# Altium PCB msp430最小系统.PcbDoc (part 1 of 3)
Units mm, origin at the board's own origin, x right, y up, seen from the top; angles counter-clockwise.
Board outline 152.4 x 101.6 mm, 2 copper layers (Top Layer, Bottom Layer); 67 components, 101 nets, 330 pads, 20 vias.
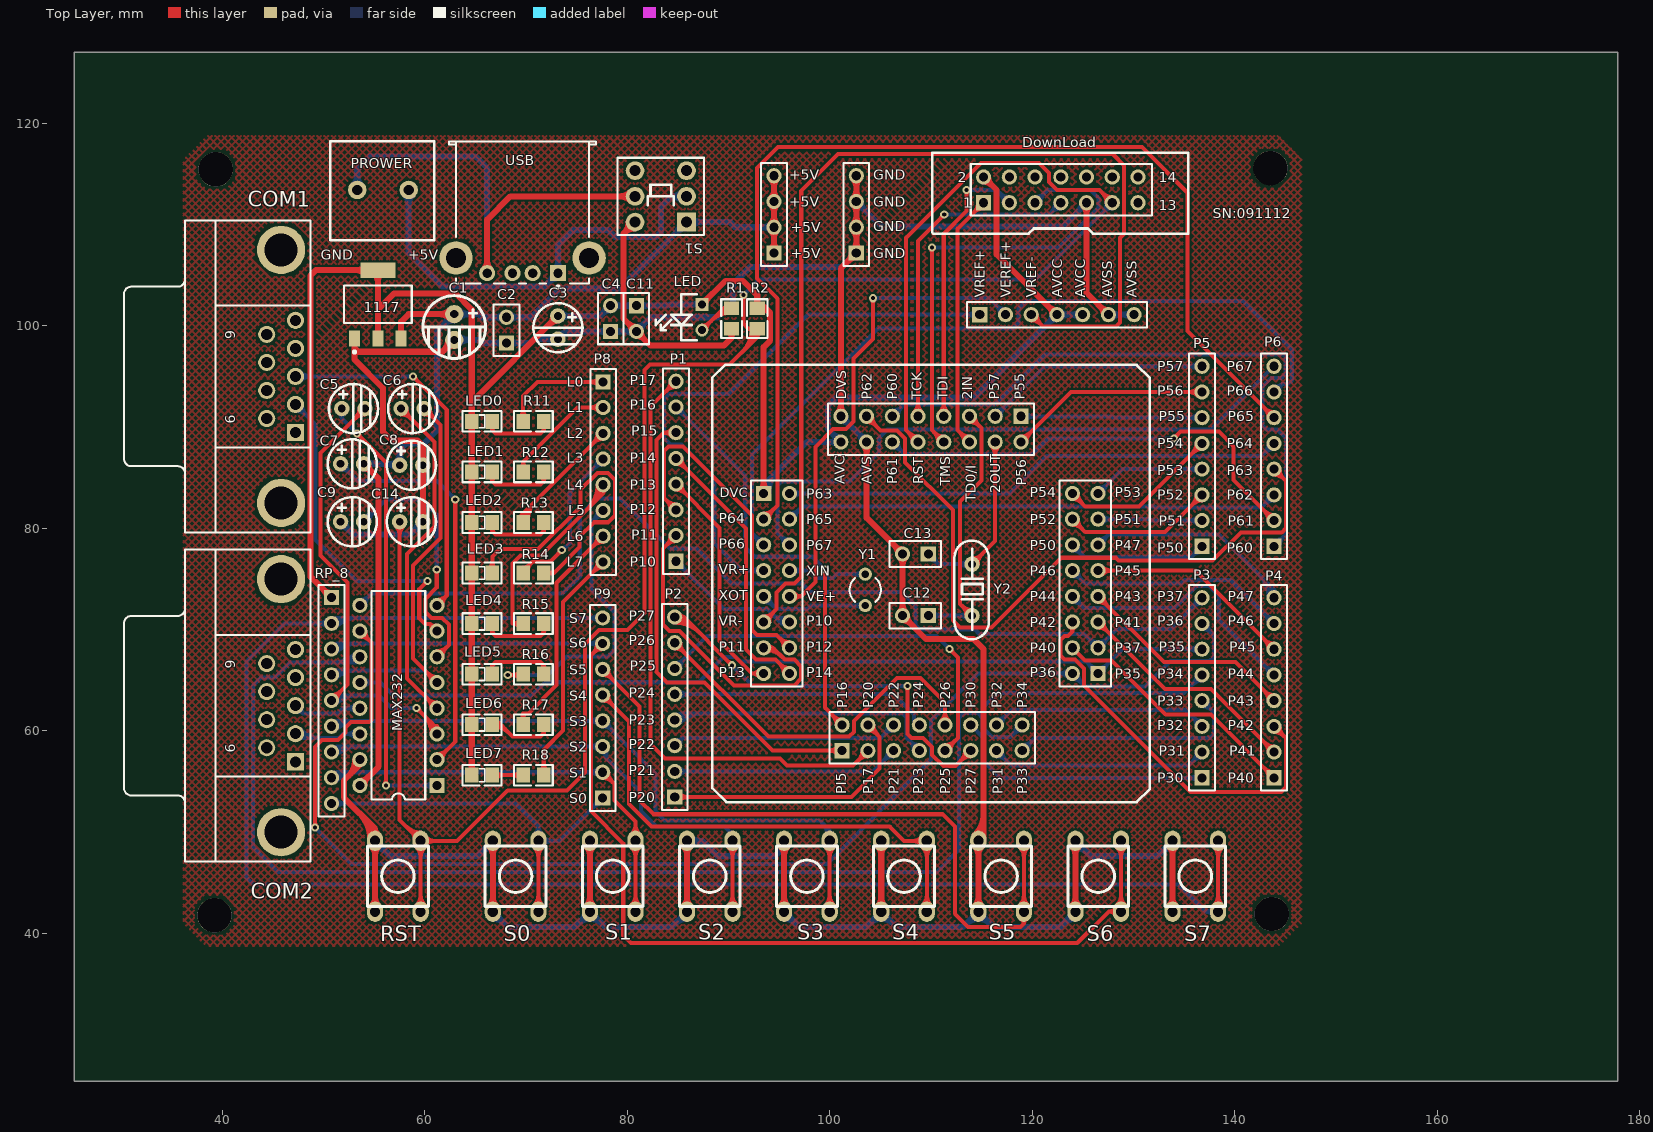
[diagram p0: Top Layer view]
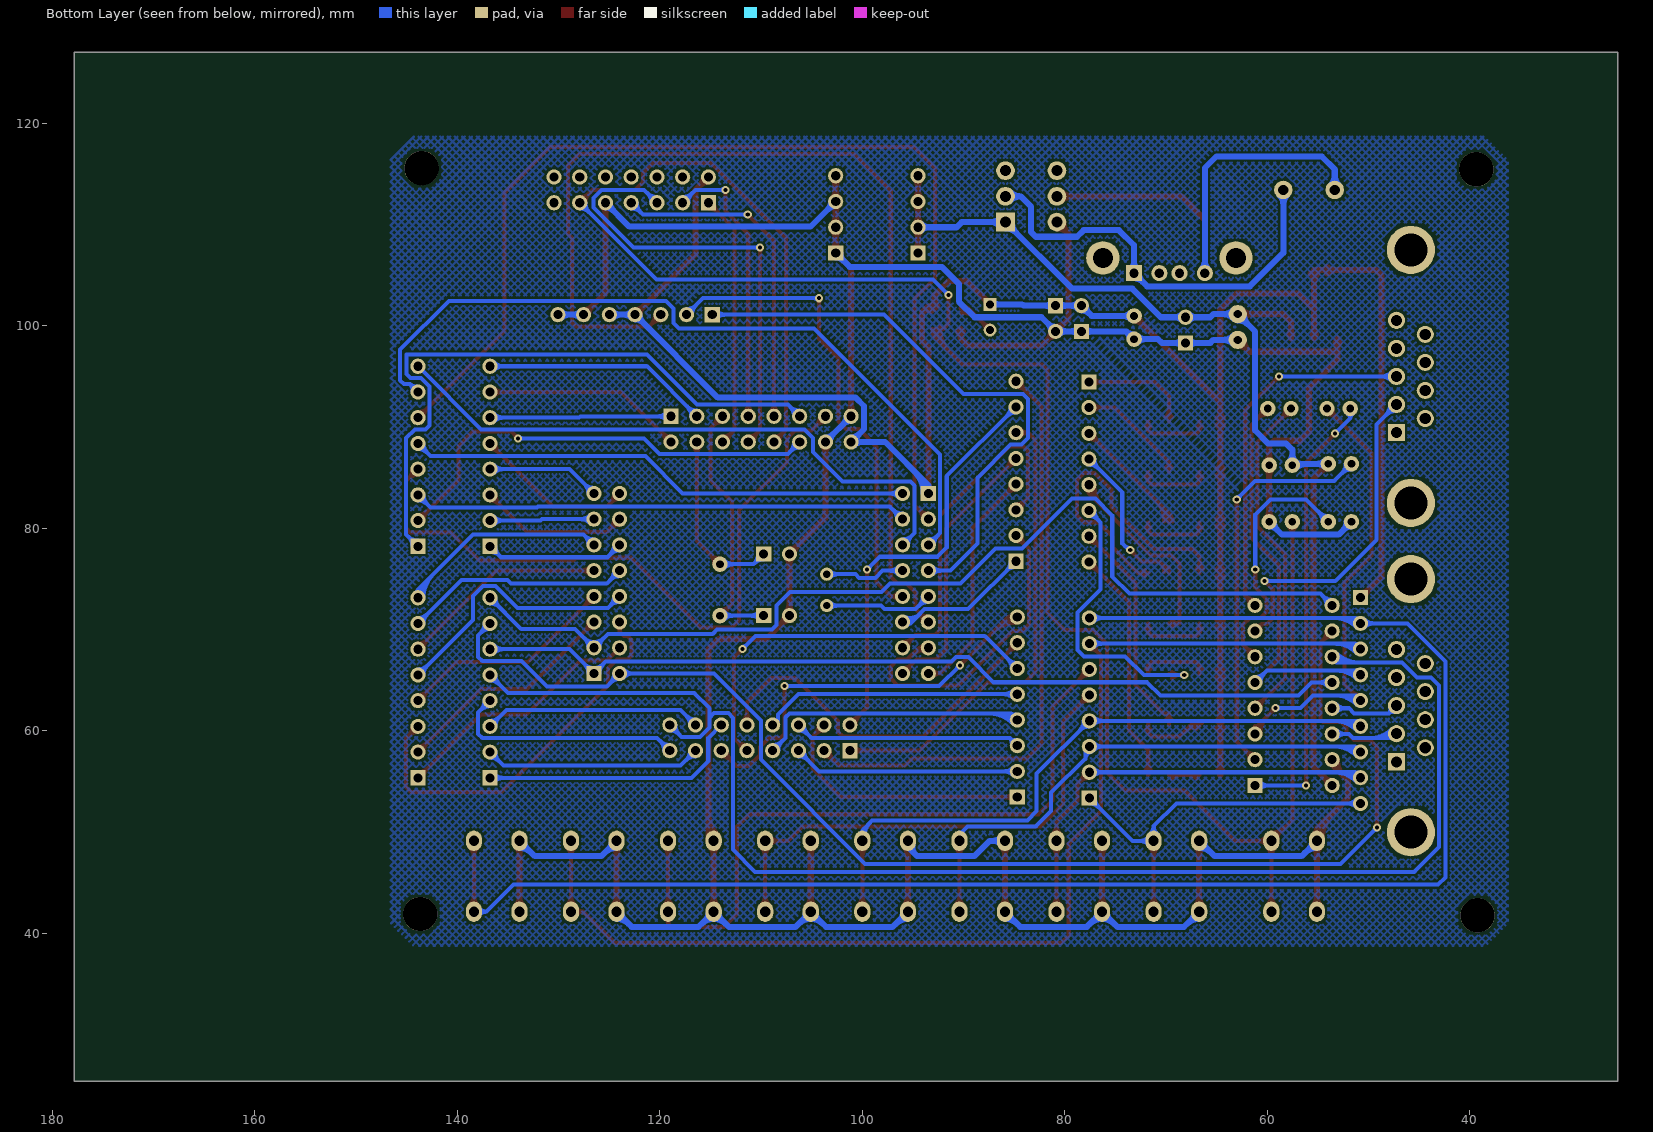
[diagram p1: Bottom Layer view, seen from below]

## Layer stack, top to bottom
Top Layer: signal copper 0.0356
Dielectric: dielectric 0.32, FR-4, Dk 4.8
Bottom Layer: signal copper 0.0356

## Board outline
25.4,25.4 177.8,25.4 177.8,127 25.4,127

## Design rules (kind name [scope] priority, off if disabled: settings)
Clearance [All] p1: gap=0.2
ComponentClearance [All] p1: gap=0.254 collisioncheckmode=3 verticalgap=0.254
PlaneClearance [All] p1: clearance=0.6
PolygonConnect [All] p1: connectstyle=Relief reliefconductorwidth=0.254 reliefentries=4 polygonreliefangle="90 Angle"
RoutingTopology [All] p1: topology=Vertical
RoutingVias [All] p1: holewidth=0.4 width=0.8 viastyle="Through Hole" minholewidth=0.4 minwidth=0.8 maxholewidth=0.4 maxwidth=0.8
SolderMaskExpansion [All] p1: expansion=0.102
TestPointUsage [All] p1: valid=0 allowmultiple=FALSE
Testpoint [All] p1: side=7 testpointundercomponent=TRUE minsize=1.016 maxsize=2.54 preferedsize=1.524 minholesize=0 maxholesize=1.016 preferedholesize=0.813 testpointgrid=0.025 style=1021 order=0-112345678
Width Width_5 [InNet('AVSS')] p1: maxlimit=0.6 minlimit=0.6 preferedwidth=0.6
Width Width_4 [InNet('NetPROWER_2')] p2: maxlimit=0.6 minlimit=0.6 preferedwidth=0.6
Width Width_3 [InNet('NetPROWER_1')] p3: maxlimit=0.6 minlimit=0.6 preferedwidth=0.6
Width Width_2 [InNet('AVCC')] p4: maxlimit=0.6 minlimit=0.6 preferedwidth=0.6
Width Width_1 [InNet('+5V')] p5: maxlimit=0.6 minlimit=0.6 preferedwidth=0.6
Width [All] p6: maxlimit=0.4 minlimit=0.4 preferedwidth=0.4
15 further rules are at their usual default settings.

## Classes and differential pairs
component class msp430最小系统: +5V C1 C2 C3 C4 C5 C6 C7 C8 C9 C10 C11 C12 C13 C14 COM1 COM2 DownLoad GND LED LED0 LED1 LED2 LED3 LED4 LED5 LED6 LED7 MSP430 P1 S0 S1 S2 S3 S4 S5 S6 S7

## Components (designator, comment, footprint, x,y, rotation, side; value= is the part's Value field where it differs from the comment)
1117 "REG1117-3.3" ZZ311 55.372,102.108 r0 top (schematic designator REG1117-3.3)
+5V "Header 4" HDR1X4 94.488,107.188 r90 top
C1 "Cap Pol1" C-DJ-6 62.992,98.552 r270 top
C2 "Cap Semi" CPDR 68.072,99.568 r90 top
C3 "Cap Pol1" C-DJ-4#1 70.612,98.552 r270 top
C4 "Cap Semi" CPDR 78.359,100.711 r90 top
C5 "Cap Pol1" C-DJ-4#1 54.229,89.281 r0 top
C6 "Cap Pol1" C-DJ-4#1 60.071,89.281 r0 top
C7 "Cap Pol1" C-DJ-4#2 54.102,83.82 r0 top
C8 "Cap Pol1" C-DJ-4#1 59.944,83.693 r0 top
C9 "Cap Pol1" C-DJ-4#1 54.102,78.105 r0 top
C11 "Cap Semi" CPDR 80.899,100.711 r270 top
C12 "CPDR" CPDR 108.458,71.374 r180 top (schematic designator C14)
C13 "CPDR" CPDR 108.458,77.47 r180 top (schematic designator C15)
C14 "Cap Pol1" C-DJ-4#1 59.944,78.105 r0 top (schematic designator C16)
COM1 "D Connector 9" COM-9 47.244,106.68 r90 top
COM2 "D Connector 9" COM-9 47.244,74.168 r90 top
DownLoad "Header 7X2" HDR-2X7 120.396,112.268 r0 top
GND "Header 4" HDR1X4 102.616,107.188 r90 top
LED "LED" LED 86.868,100.076 r90 top (schematic designator DS1)
LED0 "LED" TP-0805-D 68.199,89.281 r0 top (schematic designator D10)
LED1 "LED" TP-0805-D 68.199,84.292 r0 top (schematic designator D11)
LED2 "LED" TP-0805-D 68.199,79.302 r0 top (schematic designator D12)
LED3 "LED" TP-0805-D 68.199,74.313 r0 top (schematic designator D13)
LED4 "LED" TP-0805-D 68.199,69.324 r0 top (schematic designator D14)
LED5 "LED" TP-0805-D 68.199,64.335 r0 top (schematic designator D15)
LED6 "LED" TP-0805-D 68.199,59.345 r0 top (schematic designator D16)
LED7 "LED" TP-0805-D 68.199,54.356 r0 top (schematic designator D17)
MAX232 "MAX232CSE" DIP-16 57.404,63.5 r90 top (schematic designator U1)
P1 "Header 8" HDR-8 84.836,89.408 r90 top
P1_16 "Header 8X2" HDR2X8 93.472,83.439 r270 top
P2 "Header 8" HD-8 88.392,66.548 r90 top
P3 "Header 8" HD-8 140.462,68.453 r90 top
P4 "Header 8" HD-8 147.574,68.453 r90 top
P5 "Header 8" HD-8 140.462,91.313 r90 top
P6 "Header 8" HD-8 147.574,91.313 r90 top
P7 "Header 7" HDR1X7 114.808,101.092 r0 top
P8 "PZ_8" HDR-8 77.597,81.788 r270 top
P9 "PZ_8" HDR-8 77.597,66.04 r90 top
P17_32 "Header 8X2" HDR2X8 101.219,58.039 r0 top
P33_48 "Header 8X2" HDR2X8 126.492,65.659 r90 top
P49_64 "Header 8X2" HDR2X8 118.872,91.059 r180 top
PROWER "PZ_2" JK128_2 57.912,112.268 r270 top
R1 "Res" TP-0805-R 91.567,103.251 r90 top
R2 "Res" TP-0805-R 91.567,98.171 r270 top
R11 "RES1" TP-0805-R 73.279,89.281 r0 top
R12 "RES1" TP-0805-R 73.279,84.292 r0 top
R13 "RES1" TP-0805-R 73.279,79.302 r0 top
R14 "RES1" TP-0805-R 73.279,74.313 r0 top
R15 "RES1" TP-0805-R 73.279,69.324 r0 top
R16 "RES1" TP-0805-R 73.279,64.335 r0 top
R17 "RES1" TP-0805-R 73.279,59.345 r0 top
R18 "RES1" TP-0805-R 68.199,56.896 r180 top
RP_8 "Comment" HDR-9 50.8,57.912 r270 top
RST "AJKG" an-6*6 62.484,51.816 r90 top (schematic designator S2)
S0 "S0" an-6*6 74.105,51.816 r90 top (schematic designator 1)
S1 "ZSKG_KEY" DPDT-6 83.312,112.776 r180 top
S1 "S1" an-6*6 83.693,51.816 r90 top (schematic designator 2)
S2 "S2" an-6*6 93.281,51.816 r90 top (schematic designator 3)
S3 "S3" an-6*6 102.87,51.816 r90 top (schematic designator 4)
S4 "S4" an-6*6 112.459,51.816 r90 top (schematic designator 5)
S5 "S5" an-6*6 122.047,51.816 r90 top (schematic designator 6)
S6 "S6" an-6*6 131.636,51.816 r90 top (schematic designator 7)
S7 "S7" an-6*6 141.224,51.816 r90 top (schematic designator 8)
USB "PZ_4" USB-5V 66.04,107.696 r90 top
Y1 "XTAL" BCY-W2/D3.1 103.505,73.914 r0 top
Y2 "XTAL" JZ_ZC 114.046,71.374 r270 top

## Footprints (in the part's own frame and the unit in brackets; to place one, negate y for a bottom-side part, rotate by r counter-clockwise, add the part's x,y. Pads: shape width x height; smd on the part's side, far side on the other; paste and mask are expansions set on the pad)
an-6*6 [mm] "按键"
  oval 2x1.6 hole 1: 1(-9.675,7.381) 1(-2.675,7.381) 2(-9.675,2.881) 2(-2.675,2.881)
  silkscreen extent -9.17,2.13 -3.17,8.13
BCY-W2/D3.1 [mm] "Crystal, Thru-Hole; 2 Leads; Body 3.1 x 8.2 mm (Dia.xH)"
  round 1.3 hole 0.7: 1(0,1.55) 2(0,-1.55)
  silkscreen extent -1.55,-1.19 1.55,1.17
C-DJ-4#1 [mil] "电容4mm"
  round 60 hole 30: 1(-95,100) 2(-5,100)
  silkscreen extent -145,5 46,196
C-DJ-4#2 [mil] "电容4mm"
  round 60 hole 30: 1(-95,100)
  round 60 hole 30 paste+0: 2(-5,100)
  silkscreen extent -145,5 46,195
C-DJ-6 [mm] "电容6mm"
  round 1.8 hole 0.8: 1(-2.591,-0.076) 2(-0.051,-0.076)
  silkscreen extent -4.42,-3.18 1.78,3.02
COM-9 [mm] "串口通信口"
  rect 1.69x1.69 hole 1.09: 1(-17.224,0.002)
  round 1.69 hole 1.09: 2(-14.454,0.002) 3(-11.684,0.002) 4(-8.914,0.002) 5(-6.144,0.002) 6(-15.839,2.842) 7(-13.069,2.842) 8(-10.299,2.842) 9(-7.529,2.842)
  round 4.76 hole 3.26: 10(-24.179,1.422) 11(0.811,1.422)
  silkscreen extent -27.08,-1.48 3.72,16.92
CPDR [mm] "瓷片电容"
  rect 1.5x1.5 hole 0.9: 1(-1.27,0)
  round 1.5 hole 0.9: 2(1.27,0)
  silkscreen extent -2.54,-1.27 2.54,1.27
DIP-16 [mm] "直插16管脚"
  rect 1.5x1.5 hole 0.9: 1(-8.89,-3.81)
  round 1.5 hole 0.9: 2(-6.35,-3.81) 3(-3.81,-3.81) 4(-1.27,-3.81) 5(1.27,-3.81) 6(3.81,-3.81) 7(6.35,-3.81) 8(8.89,-3.81) 9(8.89,3.81) 10(6.35,3.81) 11(3.81,3.81) 12(1.27,3.81) 13(-1.27,3.81) 14(-3.81,3.81) 15(-6.35,3.81) 16(-8.89,3.81)
  silkscreen extent -10.3,-2.65 10.3,2.65
DPDT-6 [mm] "开关按键"
  round 1.85 hole 1.1: 1(-2.54,0) 2(-2.54,-2.54) 4(2.54,-2.54) 5(2.54,0) 6(2.54,2.54)
  rect 1.85x1.85 hole 1.1: 3(-2.54,2.54)
  silkscreen extent -4.28,-3.81 4.28,3.81
HD-8 [mm] "8排针"
  rect 1.5x1.5 hole 0.9: 1(-13.093,3.707)
  round 1.5 hole 0.9: 2(-10.553,3.707) 3(-8.013,3.707) 4(-5.473,3.707) 5(-2.933,3.707) 6(-0.393,3.707) 7(2.147,3.707) 8(4.687,3.707)
  silkscreen extent -14.36,2.44 5.96,4.98
HDR1X4 [mm] "Connector; Header; 4 Position"
  rect 1.5x1.5 hole 0.9: 1(0,0)
  round 1.5 hole 0.9: 2(2.54,0) 3(5.08,0) 4(7.62,0)
  silkscreen extent -1.27,-1.27 8.89,1.27
HDR1X7 [mm] "Connector; Header; 7 Position"
  rect 1.5x1.5 hole 0.9: 1(0,0)
  round 1.5 hole 0.9: 2(2.54,0) 3(5.08,0) 4(7.62,0) 5(10.16,0) 6(12.7,0) 7(15.24,0)
  silkscreen extent -1.27,-1.27 16.51,1.27
HDR2X8 [mm]
  rect 1.5x1.5 hole 0.9: 1(0,0)
  round 1.5 hole 0.9: 2(0,2.54) 3(2.54,0) 4(2.54,2.54) 5(5.08,0) 6(5.08,2.54) 7(7.62,0) 8(7.62,2.54) 9(10.16,0) 10(10.16,2.54) 11(12.7,0) 12(12.7,2.54) 13(15.24,0) 14(15.24,2.54) 15(17.78,0) 16(17.78,2.54)
  silkscreen extent -1.27,-1.27 19.05,3.81
HDR-2X7 [mm] "MPS430下载口"
  rect 1.5x1.5 hole 0.9: 1(-5.207,-0.127)
  round 1.5 hole 0.9: 2(-5.207,2.413) 3(-2.667,-0.127) 4(-2.667,2.413) 5(-0.127,-0.127) 6(-0.127,2.413) 7(2.413,-0.127) 8(2.413,2.413) 9(4.953,-0.127) 10(4.953,2.413) 11(7.493,-0.127) 12(7.493,2.413) 13(10.033,-0.127) 14(10.033,2.413)
  silkscreen extent -10.29,-3.17 14.99,4.83
HDR-8 [mm] "8排针"
  rect 1.5x1.5 hole 0.9: 1(-12.669,0.023)
  round 1.5 hole 0.9: 2(-10.129,0.023) 3(-7.589,0.023) 4(-5.049,0.023) 5(-2.509,0.023) 6(0.031,0.023) 7(2.571,0.023) 8(5.111,0.023)
  silkscreen extent -13.94,-1.25 6.38,1.29
HDR-9 [mm] "9排针"
  rect 1.5x1.5 hole 0.9: 1(-15.24,0)
  round 1.5 hole 0.9: 2(-12.7,0) 3(-10.16,0) 4(-7.62,0) 5(-5.08,0) 6(-2.54,0) 7(0,0) 8(2.54,0) 9(5.08,0)
  silkscreen extent -16.51,-1.27 6.35,1.27
JK128_2 [mil] "接线端子"
  round 71.81 hole 39.37: 1(-45,20) 2(-45,-180)
  silkscreen extent -235,-285 150,120
JZ_ZC [mil] "晶振"
  round 60 hole 30: 1(-200,0) 2(0,0)
  silkscreen extent -292,-68 92,65
LED [mil] "发光二极管"
  rect 50x50 hole 32: 1(80,-20)
  round 50 hole 32: 2(-20,-20)
  silkscreen extent -60,0 120,160
TP-0805-D [mm] "贴片二极管"
  rect 1.3x1.5 smd: 1(-3.556,1.27) 2(-1.524,1.27)
  silkscreen extent -4.44,0.25 -0.64,2.29
TP-0805-R [mm] "贴片0805"
  rect 1.3x1.5 smd: 1(-3.556,1.27) 2(-1.524,1.27)
  silkscreen extent -4.44,0.25 -0.64,2.29
USB-5V [mm] "USB接口"
  rect 1.6x1.6 hole 0.92: 1(-2.503,-7.123)
  round 1.6 hole 0.92: 2(-2.503,-4.624) 3(-2.503,-2.624) 4(-2.503,-0.124)
  round 3.3 hole 2: 5(-1.002,2.947) 6(-1.002,-10.193)
  silkscreen extent -3.98,-10.87 10.5,3.63
ZZ311 [mm] "SOT-223/SC-73; 4 Leads; Body 6.7 x 7.3 mm, inc. leads (LxW max)"
  rect 1.1x1.55 smd: 1(-2.3,-3.375) 2(0,-3.375) 3(2.3,-3.375)
  rect 3.45x1.55 smd: 4(0,3.375)
  silkscreen extent -3.35,-4.82 3.35,1.85

## Part data
1117: "800mA and 1A Low Dropout Positive Regulator 2.85V, 3.3V, 5V, and Adjustable"
+5V GND: "Header, 4-Pin"
C1 C3 C5 C6 C7 C8 C9 C14: "Polarized Capacitor (Radial)"
C2 C4 C11: "Capacitor (Semiconductor SIM Model)"
C12 C13: "瓷片电容"
COM1 COM2: "Receptacle Assembly, 9 Position, Right Angle"
DownLoad: "Header, 7-Pin, Dual row"
LED: "发光二极管"
MAX232: "+5V Powered, Multi-Channel RS-232 Driver/Receiver"
P1 P2 P3 P4 P5 P6: "Header, 8-Pin"
P1_16 P17_32 P33_48 P49_64: "Header, 8-Pin, Dual row"
P7: "Header, 7-Pin"
P8 P9: "排针——8"
PROWER: "排针——2"
R1 R2: "电阻"
RST: "按键开关"
S0 S1 S2 S3 S4 S5 S6 S7: library part KEY
S1: "自锁开关"
USB: "排针——4"
Y1 Y2: "Crystal Oscillator"

## Free pads (board coordinates)
  round 3.4 hole 3.4: 0(143.51,115.57) 1(143.637,41.91) 2(39.243,41.783) 3(39.37,115.443)

## Via types
v1: diameter 0.8, hole 0.4, Top Layer to Bottom Layer, 20 vias

## Nets (pads, with @x,y where several pads share a name; then routed paths per layer and width w, separated by ;. In a path a pad name is that pad's centre, name@x,y a point inside that pad or via, vN(x,y) a via of type N, cw(c..) or ccw(c..) an arc to the next point about the centre after c; other vN are vias at no path point)
5V: 
+5V: 1117.3 +5V.1 +5V.2 +5V.3 +5V.4 C1.1 C2.2 C7.2 C8.1 MAX232.16 S1.3 | length 173.2
  Top Layer w0.6: MAX232.16@53.594,54.61 55.444,56.46 55.444,84.891 C7.2@53.975,86.36 ; 1117.3@57.672,98.733 57.672,100.395 58.42,101.143 C1.1@62.916,101.143 ; +5V.1@94.488,107.188 +5V.2@94.488,109.728 +5V.3@94.488,112.268 +5V.4@94.488,114.808 ; 54.362,55.378 cw(c53.594,56.146) 53.594,55.06 ccw(c53.594,56.146) 54.362,55.378 ; 54.362,55.378 ccw(c55.13,54.61) 54.044,54.61 cw(c55.13,54.61) 54.362,55.378 ; 54.764,85.571 cw(c55.552,86.36) 54.437,86.36 ccw(c55.552,86.36) 54.764,85.571 ; 54.764,85.571 ccw(c53.975,84.783) 53.975,85.898 cw(c53.975,84.783) 54.764,85.571 ; 57.672,99.562 cw(c57.068,99.562) 57.495,99.135 ccw(c57.068,99.562) 57.672,99.562 ; 57.672,99.562 ccw(c58.276,99.562) 57.849,99.135 cw(c58.276,99.562) 57.672,99.562 ; 61.467,101.143 cw(c61.467,99.694) 62.492,100.719 ccw(c61.467,99.694) 61.467,101.143 ; 61.467,101.143 ccw(c61.467,102.591) 62.492,101.567 cw(c61.467,102.591) 61.467,101.143 ; 94.488,108.274 cw(c93.402,108.274) 94.17,107.506 ccw(c93.402,108.274) 94.488,108.274 ; 94.488,108.274 ccw(c95.574,108.274) 94.806,107.506 cw(c95.574,108.274) 94.488,108.274 ; 94.488,108.642 cw(c95.574,108.642) 94.806,109.41 ccw(c95.574,108.642) 94.488,108.642 ; 94.488,108.642 ccw(c93.402,108.642) 94.17,109.41 cw(c93.402,108.642) 94.488,108.642 ; 94.488,110.814 cw(c93.402,110.814) 94.17,110.046 ccw(c93.402,110.814) 94.488,110.814 ; 94.488,110.814 ccw(c95.574,110.814) 94.806,110.046 cw(c95.574,110.814) 94.488,110.814 ; 94.488,111.182 cw(c95.574,111.182) 94.806,111.95 ccw(c95.574,111.182) 94.488,111.182 ; 94.488,111.182 ccw(c93.402,111.182) 94.17,111.95 cw(c93.402,111.182) 94.488,111.182 ; 94.488,113.354 cw(c93.402,113.354) 94.17,112.586 ccw(c93.402,113.354) 94.488,113.354 ; 94.488,113.354 ccw(c95.574,113.354) 94.806,112.586 cw(c95.574,113.354) 94.488,113.354 ; 94.488,113.722 cw(c95.574,113.722) 94.806,114.49 ccw(c95.574,113.722) 94.488,113.722 ; 94.488,113.722 ccw(c93.402,113.722) 94.17,114.49 cw(c93.402,113.722) 94.488,113.722
  Bottom Layer w0.6: C7.2@53.975,86.36 57.404,86.36 57.531,86.487 57.531,87.757 58.166,88.392 59.944,88.392 61.214,89.662 61.214,99.441 C1.1@62.916,101.143 65.329,101.143 65.634,100.838 C2.2@68.072,100.838 70.508,100.838 73.327,103.657 79.273,103.657 S1.3@85.852,110.236 90.17,110.236 90.678,109.728 +5V.2@94.488,109.728 ; C7.2@54.302,86.033 cw(c55.09,85.245) 55.09,86.36 cw(c55.09,87.475) C7.2@54.302,86.687 ; 56.109,86.36 cw(c56.109,84.811) C8.1@57.204,85.906 ; 56.722,86.36 ccw(c56.722,87.042) 57.204,86.56 ccw(c56.416,87.348) 57.531,87.348 ccw(c58.646,87.348) C8.1@57.858,86.56 ; 61.892,100.119 cw(c62.916,99.094) 62.916,100.543 ccw(c62.916,99.094) 61.892,100.119 ; 61.892,100.119 ccw(c60.867,101.143) 62.316,101.143 cw(c60.867,101.143) 61.892,100.119 ; 64.364,101.143 cw(c64.364,102.591) 63.34,101.567 ccw(c64.364,102.591) 64.364,101.143 ; 64.364,101.143 ccw(c64.364,99.694) 63.34,100.719 cw(c64.364,99.694) 64.364,101.143 ; 66.986,100.838 cw(c66.986,99.752) 67.754,100.52 ccw(c66.986,99.752) 66.986,100.838 ; 66.986,100.838 ccw(c66.986,101.924) 67.754,101.156 cw(c66.986,101.924) 66.986,100.838 ; 69.158,100.838 cw(c69.158,101.924) 68.39,101.156 ccw(c69.158,101.924) 69.158,100.838 ; 69.158,100.838 ccw(c69.158,99.752) 68.39,100.52 cw(c69.158,99.752) 69.158,100.838 ; 84.785,109.169 cw(c85.852,108.102) 85.852,109.611 ccw(c85.852,108.102) 84.785,109.169 ; 84.785,109.169 ccw(c83.718,110.236) 85.227,110.236 cw(c83.718,110.236) 84.785,109.169 ; 87.361,110.236 cw(c87.361,111.745) 86.294,110.678 ccw(c87.361,111.745) 87.361,110.236 ; 87.361,110.236 ccw(c87.361,108.727) 86.294,109.794 cw(c87.361,108.727) 87.361,110.236 ; 93.402,109.728 cw(c93.402,108.642) 94.17,109.41 ccw(c93.402,108.642) 93.402,109.728 ; 93.402,109.728 ccw(c93.402,110.814) 94.17,110.046 cw(c93.402,110.814) 93.402,109.728
AVCC: 1117.2 1117.4 C3.1 C4.2 C11.1 DownLoad.2 LED0.1 LED1.1 LED2.1 LED3.1 LED4.1 LED5.1 LED6.1 LED7.1 LED.1 P1_16.1 P7.4 P7.5 P49_64.16 R2.1 RP_8.1 | length 340.1
  Top Layer w0.6: RP_8.1@50.8,73.152 48.743,75.209 48.743,104.975 49.251,105.483 1117.4@55.372,105.483 55.372,101.6 ; 1117.2@55.372,98.733 55.372,101.6 ; LED7.1@64.643,55.626 LED6.1@64.643,60.615 LED5.1@64.643,65.605 LED4.1@64.643,70.594 LED3.1@64.643,75.583 LED2.1@64.643,80.572 LED1.1@64.643,85.562 LED0.1@64.643,90.551 64.643,92.456 ; C3.1@73.152,100.965 64.643,92.456 ; LED.1@87.376,102.108 89.687,104.419 91.44,104.419 92.837,103.022 R2.1@92.837,101.727 93.662,101.727 ; P1_16.1@93.472,83.439 93.472,97.892 94.107,98.527 94.107,101.282 93.662,101.727 ; DownLoad.2@115.189,114.681 116.459,113.411 116.459,107.061 P7.4@122.428,101.092 ; 50.032,73.92 cw(c49.264,73.152) 50.35,73.152 ccw(c49.264,73.152) 50.032,73.92 ; 50.032,73.92 ccw(c50.8,74.688) 50.8,73.602 cw(c50.8,74.688) 50.032,73.92 ; 53.275,105.483 cw(c53.275,104.336) 54.086,105.147 ccw(c53.275,104.336) 53.275,105.483 ; 53.275,105.483 ccw(c53.275,106.63) 54.086,105.819 cw(c53.275,106.63) 53.275,105.483 ; 55.372,99.562 cw(c54.768,99.562) 55.195,99.135 ccw(c54.768,99.562) 55.372,99.562 ; 55.372,99.562 ccw(c55.976,99.562) 55.549,99.135 cw(c55.976,99.562) 55.372,99.562 ; 55.372,101.6 56.972,103.2 63.043,103.2 64.643,101.6 64.643,92.456 ; 55.372,104.336 cw(c56.519,104.336) 55.708,105.147 ccw(c56.519,104.336) 55.372,104.336 ; 55.372,104.336 ccw(c54.225,104.336) 55.036,105.147 cw(c54.225,104.336) 55.372,104.336 ; 64.643,56.571 cw(c63.798,56.571) 64.396,55.973 ccw(c63.798,56.571) 64.643,56.571 ; 64.643,56.571 ccw(c65.488,56.571) 64.89,55.973 cw(c65.488,56.571) 64.643,56.571 ; 64.643,59.67 cw(c65.488,59.67) 64.89,60.268 ccw(c65.488,59.67) 64.643,59.67 ; 64.643,59.67 ccw(c63.798,59.67) 64.396,60.268 cw(c63.798,59.67) 64.643,59.67 ; 64.643,61.56 cw(c63.798,61.56) 64.396,60.963 ccw(c63.798,61.56) 64.643,61.56 ; 64.643,61.56 ccw(c65.488,61.56) 64.89,60.963 cw(c65.488,61.56) 64.643,61.56 ; 64.643,64.66 cw(c65.488,64.66) 64.89,65.257 ccw(c65.488,64.66) 64.643,64.66 ; 64.643,64.66 ccw(c63.798,64.66) 64.396,65.257 cw(c63.798,64.66) 64.643,64.66 ; 64.643,66.55 cw(c63.798,66.55) 64.396,65.952 ccw(c63.798,66.55) 64.643,66.55 ; 64.643,66.55 ccw(c65.488,66.55) 64.89,65.952 cw(c65.488,66.55) 64.643,66.55 ; 64.643,69.649 cw(c65.488,69.649) 64.89,70.246 ccw(c65.488,69.649) 64.643,69.649 ; 64.643,69.649 ccw(c63.798,69.649) 64.396,70.246 cw(c63.798,69.649) 64.643,69.649 ; 64.643,71.539 cw(c63.798,71.539) 64.396,70.941 ccw(c63.798,71.539) 64.643,71.539 ; 64.643,71.539 ccw(c65.488,71.539) 64.89,70.941 cw(c65.488,71.539) 64.643,71.539 ; 64.643,74.638 cw(c65.488,74.638) 64.89,75.236 ccw(c65.488,74.638) 64.643,74.638 ; 64.643,74.638 ccw(c63.798,74.638) 64.396,75.236 cw(c63.798,74.638) 64.643,74.638 ; 64.643,76.528 cw(c63.798,76.528) 64.396,75.931 ccw(c63.798,76.528) 64.643,76.528 ; 64.643,76.528 ccw(c65.488,76.528) 64.89,75.931 cw(c65.488,76.528) 64.643,76.528 ; 64.643,79.627 cw(c65.488,79.627) 64.89,80.225 ccw(c65.488,79.627) 64.643,79.627 ; 64.643,79.627 ccw(c63.798,79.627) 64.396,80.225 cw(c63.798,79.627) 64.643,79.627 ; 64.643,81.517 cw(c63.798,81.517) 64.396,80.92 ccw(c63.798,81.517) 64.643,81.517 ; 64.643,81.517 ccw(c65.488,81.517) 64.89,80.92 cw(c65.488,81.517) 64.643,81.517 ; 64.643,84.617 cw(c65.488,84.617) 64.89,85.214 ccw(c65.488,84.617) 64.643,84.617 ; 64.643,84.617 ccw(c63.798,84.617) 64.396,85.214 cw(c63.798,84.617) 64.643,84.617 ; 64.643,86.507 cw(c63.798,86.507) 64.396,85.909 ccw(c63.798,86.507) 64.643,86.507 ; 64.643,86.507 ccw(c65.488,86.507) 64.89,85.909 cw(c65.488,86.507) 64.643,86.507 ; 64.643,89.606 cw(c65.488,89.606) 64.89,90.203 ccw(c65.488,89.606) 64.643,89.606 ; 64.643,89.606 ccw(c63.798,89.606) 64.396,90.203 cw(c63.798,89.606) 64.643,89.606 ; 64.643,91.496 cw(c63.798,91.496) 64.396,90.898 ccw(c63.798,91.496) 64.643,91.496 ; 64.643,91.496 ccw(c65.488,91.496) 64.89,90.898 cw(c65.488,91.496) 64.643,91.496 ; 72.363,100.176 cw(c73.152,99.388) 73.152,100.503 ccw(c73.152,99.388) 72.363,100.176 ; 72.363,100.176 ccw(c71.575,100.965) 72.69,100.965 cw(c71.575,100.965) 72.363,100.176 ; LED.1@87.948,102.68 cw(c87.376,103.252) 87.376,102.443 ccw(c87.376,103.252) LED.1@87.948,102.68 ; LED.1@87.948,102.68 ccw(c88.52,102.108) 87.711,102.108 cw(c88.52,102.108) LED.1@87.948,102.68 ; 92.837,102.572 cw(c91.992,102.572) 92.59,101.974 ccw(c91.992,102.572) 92.837,102.572 ; 92.837,102.572 ccw(c93.682,102.572) 93.084,101.974 cw(c93.682,102.572) 92.837,102.572 ; 93.472,84.525 cw(c92.386,84.525) 93.154,83.757 ccw(c92.386,84.525) 93.472,84.525 ; 93.472,84.525 ccw(c94.558,84.525) 93.79,83.757 cw(c94.558,84.525) 93.472,84.525 ; 93.662,101.727 cw(c93.662,102.304) 93.211,101.945 ccw(c93.662,102.304) 93.662,101.727 ; 93.662,101.727 ccw(c93.662,101.15) 93.211,101.509 cw(c93.662,101.15) 93.662,101.727 ; 115.957,113.913 cw(c116.725,114.681) 115.639,114.681 ccw(c116.725,114.681) 115.957,113.913 ; 115.957,113.913 ccw(c115.189,113.145) 115.189,114.231 cw(c115.189,113.145) 115.957,113.913 ; 121.66,101.86 cw(c120.892,101.092) 121.978,101.092 ccw(c120.892,101.092) 121.66,101.86 ; 121.66,101.86 ccw(c122.428,102.628) 122.428,101.542 cw(c122.428,102.628) 121.66,101.86 ; R2.1@92.893,101.973 cw(c93.045,101.122) 93.656,101.733 ccw(c93.045,101.122) R2.1@92.893,101.973 ; R2.1@93.138,101.441 cw(c93.536,100.875) 94.025,101.364 ccw(c93.536,100.875) R2.1@93.138,101.441
  Bottom Layer w0.6: C3.1@73.152,100.965 77.343,100.965 C4.2@78.359,101.981 C11.1@80.899,101.981 84.074,101.981 84.201,102.108 LED.1@87.376,102.108 ; P1_16.1@93.472,83.439 93.472,84.245 ; P7.5@124.968,101.092 P7.4@122.428,101.092 114.245,92.909 100.656,92.909 99.822,92.075 99.822,89.789 P49_64.16@101.092,88.519 97.746,88.519 93.472,84.245 ; 74.267,100.965 cw(c74.267,102.08) 73.479,101.292 ccw(c74.267,102.08) 74.267,100.965 ; 74.267,100.965 ccw(c74.267,99.85) 73.479,100.638 cw(c74.267,99.85) 74.267,100.965 ; 77.591,101.213 cw(c78.359,100.445) 78.359,101.531 ccw(c78.359,100.445) 77.591,101.213 ; 77.591,101.213 ccw(c76.823,101.981) 77.909,101.981 cw(c76.823,101.981) 77.591,101.213 ; 79.445,101.981 cw(c79.445,103.067) 78.677,102.299 ccw(c79.445,103.067) 79.445,101.981 ; 79.445,101.981 ccw(c79.445,100.895) 78.677,101.663 cw(c79.445,100.895) 79.445,101.981 ; 79.813,101.981 cw(c79.813,100.895) 80.581,101.663 ccw(c79.813,100.895) 79.813,101.981 ; 79.813,101.981 ccw(c79.813,103.067) 80.581,102.299 cw(c79.813,103.067) 79.813,101.981 ; 81.985,101.981 cw(c81.985,103.067) 81.217,102.299 ccw(c81.985,103.067) 81.985,101.981 ; 81.985,101.981 ccw(c81.985,100.895) 81.217,101.663 cw(c81.985,100.895) 81.985,101.981 ; 86.567,102.108 cw(c86.567,101.299) 87.139,101.871 ccw(c86.567,101.299) 86.567,102.108 ; 86.567,102.108 ccw(c86.567,102.917) 87.139,102.345 cw(c86.567,102.917) 86.567,102.108 ; 93.472,84.245 cw(c92.975,84.245) 93.236,83.822 ccw(c92.975,84.245) 93.472,84.245 ; 93.472,84.245 ccw(c93.969,84.245) 93.708,83.822 cw(c93.969,84.245) 93.472,84.245 ; 100.006,88.519 cw(c100.006,87.433) 100.774,88.201 ccw(c100.006,87.433) 100.006,88.519 ; 100.006,88.519 ccw(c100.006,89.605) 100.774,88.837 cw(c100.006,89.605) 100.006,88.519 ; 100.324,89.287 cw(c99.556,88.519) 100.642,88.519 ccw(c99.556,88.519) 100.324,89.287 ; 100.324,89.287 ccw(c101.092,90.055) 101.092,88.969 cw(c101.092,90.055) 100.324,89.287 ; 121.66,100.324 cw(c122.428,99.556) 122.428,100.642 ccw(c122.428,99.556) 121.66,100.324 ; 121.66,100.324 ccw(c120.892,101.092) 121.978,101.092 cw(c120.892,101.092) 121.66,100.324 ; 123.514,101.092 cw(c123.514,102.178) 122.746,101.41 ccw(c123.514,102.178) 123.514,101.092 ; 123.514,101.092 ccw(c123.514,100.006) 122.746,100.774 cw(c123.514,100.006) 123.514,101.092 ; 123.882,101.092 cw(c123.882,100.006) 124.65,100.774 ccw(c123.882,100.006) 123.882,101.092 ; 123.882,101.092 ccw(c123.882,102.178) 124.65,101.41 cw(c123.882,102.178) 123.882,101.092 ; P1_16.1@93.322,83.439 cw(c94.906,83.439) 93.786,84.559 ccw(c94.906,83.439) P1_16.1@93.322,83.439 ; P1_16.1@93.922,83.439 cw(c96.955,83.439) 94.81,85.583 ccw(c96.955,83.439) P1_16.1@93.922,83.439
AVSS: 1117.1 C1.2 C2.1 C3.2 C4.1 C8.2 C9.1 C11.2 C12.2 C13.2 C14.2 DownLoad.9 GND.1 GND.2 GND.3 GND.4 MAX232.15 P7.6 P7.7 P49_64.14 P49_64.15 R1.1 RST.1 S0.1 S1.1@76.312,42.141 S1.1@76.312,49.141 S1.6 S2.1 S3.1 S4.1 S5.1 S6.1 S7.1 | length 679.3
  Top Layer w0.6: 53.072,97.79 53.428,97.434 61.747,97.434 C1.2@62.916,98.603 ; 1117.1@53.072,98.733 53.072,96.647 55.88,93.839 55.88,89.535 56.769,88.646 59.309,88.646 59.817,88.138 C14.2@59.817,80.645 ; MAX232.15@53.594,57.15 53.594,56.667 52.019,55.093 52.019,53.401 55.103,50.317 ; RST.1@55.103,42.141 RST.1@55.103,49.141 55.103,50.317 ; C14.2@59.49,80.972 ccw(c58.702,81.76) 59.817,81.76 ccw(c60.932,81.76) C14.2@60.144,80.972 ; C8.2@59.49,85.906 cw(c58.702,85.118) 59.817,85.118 cw(c60.932,85.118) C8.2@60.144,85.906 ; C8.2@59.49,86.56 ccw(c58.702,87.348) 59.817,87.348 ccw(c60.932,87.348) C8.2@60.144,86.56 ; S0.1@66.724,42.141 S0.1@66.724,49.141 ; S1.1@76.312,42.141 S1.1@76.312,49.141 ; S1.6@80.772,110.236 79.629,109.093 79.629,100.711 C11.2@80.899,99.441 82.296,98.044 89.535,98.044 90.297,98.806 R1.1@90.297,99.695 ; S2.1@85.901,42.141 S2.1@85.901,49.141 ; S3.1@95.489,42.141 S3.1@95.489,49.141 ; P49_64.15@101.092,91.059 101.092,105.664 GND.1@102.616,107.188 GND.2@102.616,109.728 GND.3@102.616,112.268 GND.4@102.616,114.808 ; P49_64.14@103.632,88.519 103.632,81.026 C13.2@107.188,77.47 C12.2@107.188,71.374 109.499,69.063 114.198,69.063 115.189,68.072 115.189,49.141 S5.1@114.666,49.141 S5.1@114.666,42.141 ; S4.1@105.078,42.141 S4.1@105.078,49.141 ; S6.1@124.255,42.141 S6.1@124.255,49.141 ; DownLoad.9@125.349,112.141 125.349,103.251 P7.6@127.508,101.092 ; S7.1@133.843,42.141 S7.1@133.843,49.141 ; 1117.1@52.895,98.331 cw(c52.468,97.904) 53.072,97.904 ; 1117.1@52.895,98.331 cw(c52.468,97.904) 53.072,97.904 ; 1117.1@52.895,98.331 cw(c52.468,97.904) 53.072,97.904 ; 1117.1@52.895,98.331 cw(c52.468,97.904) 53.072,97.904 ; 1117.1@52.895,98.331 cw(c52.468,97.904) 53.072,97.904 ; 1117.1@52.895,98.331 cw(c52.468,97.904) 53.072,97.904 ; 53.072,97.904 cw(c53.676,97.904) 1117.1@53.249,98.331 ; 53.072,97.904 cw(c53.676,97.904) 1117.1@53.249,98.331 ; 53.072,97.904 cw(c53.676,97.904) 1117.1@53.249,98.331 ; 53.072,97.904 cw(c53.676,97.904) 1117.1@53.249,98.331 ; 53.072,97.904 cw(c53.676,97.904) 1117.1@53.249,98.331 ; 53.072,97.904 cw(c53.676,97.904) 1117.1@53.249,98.331 ; 55.103,43.548 cw(c53.896,43.548) 54.75,42.695 ccw(c53.896,43.548) 55.103,43.548 ; 55.103,43.548 ccw(c56.31,43.548) 55.457,42.695 cw(c56.31,43.548) 55.103,43.548 ; 55.103,47.734 cw(c56.31,47.734) 55.457,48.587 ccw(c56.31,47.734) 55.103,47.734 ; 55.103,47.734 ccw(c53.896,47.734) 54.75,48.587 cw(c53.896,47.734) 55.103,47.734 ; 55.103,50.317 cw(c54.4,50.317) 54.811,49.747 ccw(c54.4,50.317) 55.103,50.317 ; 55.103,50.317 ccw(c55.806,50.317) 55.395,49.747 cw(c55.806,50.317) 55.103,50.317 ; 61.892,97.579 cw(c62.916,96.554) 62.916,98.003 ccw(c62.916,96.554) 61.892,97.579 ; 61.892,97.579 ccw(c60.867,98.603) 62.316,98.603 cw(c60.867,98.603) 61.892,97.579 ; 66.724,43.548 cw(c65.517,43.548) 66.37,42.695 ccw(c65.517,43.548) 66.724,43.548 ; 66.724,43.548 ccw(c67.931,43.548) 67.077,42.695 cw(c67.931,43.548) 66.724,43.548 ; 66.724,47.734 cw(c67.931,47.734) 67.077,48.587 ccw(c67.931,47.734) 66.724,47.734 ; 66.724,47.734 ccw(c65.517,47.734) 66.37,48.587 cw(c65.517,47.734) 66.724,47.734 ; 76.312,43.548 cw(c75.105,43.548) 75.959,42.695 ccw(c75.105,43.548) 76.312,43.548 ; 76.312,43.548 ccw(c77.519,43.548) 76.666,42.695 cw(c77.519,43.548) 76.312,43.548 ; 76.312,47.734 cw(c77.519,47.734) 76.666,48.587 ccw(c77.519,47.734) 76.312,47.734 ; 76.312,47.734 ccw(c75.105,47.734) 75.959,48.587 cw(c75.105,47.734) 76.312,47.734 ; 79.705,109.169 cw(c80.772,108.102) 80.772,109.611 ccw(c80.772,108.102) 79.705,109.169 ; 79.705,109.169 ccw(c78.638,110.236) 80.147,110.236 cw(c78.638,110.236) 79.705,109.169 ; 80.131,100.209 cw(c79.363,99.441) 80.449,99.441 ccw(c79.363,99.441) 80.131,100.209 ; 80.131,100.209 ccw(c80.899,100.977) 80.899,99.891 cw(c80.899,100.977) 80.131,100.209 ; 81.667,98.673 cw(c82.435,99.441) 81.349,99.441 ccw(c82.435,99.441) 81.667,98.673 ; 81.667,98.673 ccw(c80.899,97.905) 80.899,98.991 cw(c80.899,97.905) 81.667,98.673 ; 85.901,43.548 cw(c84.694,43.548) 85.547,42.695 ccw(c84.694,43.548) 85.901,43.548 ; 85.901,43.548 ccw(c87.108,43.548) 86.254,42.695 cw(c87.108,43.548) 85.901,43.548 ; 85.901,47.734 cw(c87.108,47.734) 86.254,48.587 ccw(c87.108,47.734) 85.901,47.734 ; 85.901,47.734 ccw(c84.694,47.734) 85.547,48.587 cw(c84.694,47.734) 85.901,47.734 ; 90.297,98.85 cw(c91.142,98.85) 90.544,99.448 ccw(c91.142,98.85) 90.297,98.85 ; 90.297,98.85 ccw(c89.452,98.85) 90.05,99.448 cw(c89.452,98.85) 90.297,98.85 ; 95.489,43.548 cw(c94.282,43.548) 95.136,42.695 ccw(c94.282,43.548) 95.489,43.548 ; 95.489,43.548 ccw(c96.696,43.548) 95.843,42.695 cw(c96.696,43.548) 95.489,43.548 ; 95.489,47.734 cw(c96.696,47.734) 95.843,48.587 ccw(c96.696,47.734) 95.489,47.734 ; 95.489,47.734 ccw(c94.282,47.734) 95.136,48.587 cw(c94.282,47.734) 95.489,47.734 ; 101.092,92.145 cw(c100.006,92.145) 100.774,91.377 ccw(c100.006,92.145) 101.092,92.145 ; 101.092,92.145 ccw(c102.178,92.145) 101.41,91.377 cw(c102.178,92.145) 101.092,92.145 ; 101.848,106.42 cw(c102.616,105.652) 102.616,106.738 ccw(c102.616,105.652) 101.848,106.42 ; 101.848,106.42 ccw(c101.08,107.188) 102.166,107.188 cw(c101.08,107.188) 101.848,106.42 ; 102.616,108.274 cw(c101.53,108.274) 102.298,107.506 ccw(c101.53,108.274) 102.616,108.274 ; 102.616,108.274 ccw(c103.702,108.274) 102.934,107.506 cw(c103.702,108.274) 102.616,108.274 ; 102.616,108.642 cw(c103.702,108.642) 102.934,109.41 ccw(c103.702,108.642) 102.616,108.642 ; 102.616,108.642 ccw(c101.53,108.642) 102.298,109.41 cw(c101.53,108.642) 102.616,108.642 ; 102.616,110.814 cw(c101.53,110.814) 102.298,110.046 ccw(c101.53,110.814) 102.616,110.814 ; 102.616,110.814 ccw(c103.702,110.814) 102.934,110.046 cw(c103.702,110.814) 102.616,110.814 ; 102.616,111.182 cw(c103.702,111.182) 102.934,111.95 ccw(c103.702,111.182) 102.616,111.182 ; 102.616,111.182 ccw(c101.53,111.182) 102.298,111.95 cw(c101.53,111.182) 102.616,111.182 ; 102.616,113.354 cw(c101.53,113.354) 102.298,112.586 ccw(c101.53,113.354) 102.616,113.354 ; 102.616,113.354 ccw(c103.702,113.354) 102.934,112.586 cw(c103.702,113.354) 102.616,113.354 ; 102.616,113.722 cw(c103.702,113.722) 102.934,114.49 ccw(c103.702,113.722) 102.616,113.722 ; 102.616,113.722 ccw(c101.53,113.722) 102.298,114.49 cw(c101.53,113.722) 102.616,113.722 ; 103.632,87.433 cw(c104.718,87.433) 103.95,88.201 ccw(c104.718,87.433) 103.632,87.433 ; 103.632,87.433 ccw(c102.546,87.433) 103.314,88.201 cw(c102.546,87.433) 103.632,87.433 ; 105.078,43.548 cw(c103.871,43.548) 104.724,42.695 ccw(c103.871,43.548) 105.078,43.548 ; 105.078,43.548 ccw(c106.285,43.548) 105.431,42.695 cw(c106.285,43.548) 105.078,43.548 ; 105.078,47.734 cw(c106.285,47.734) 105.431,48.587 ccw(c106.285,47.734) 105.078,47.734 ; 105.078,47.734 ccw(c103.871,47.734) 104.724,48.587 cw(c103.871,47.734) 105.078,47.734 ; 106.42,78.238 cw(c105.652,77.47) 106.738,77.47 ccw(c105.652,77.47) 106.42,78.238 ; 106.42,78.238 ccw(c107.188,79.006) 107.188,77.92 cw(c107.188,79.006) 106.42,78.238 ; 107.188,72.46 cw(c106.102,72.46) 106.87,71.692 ccw(c106.102,72.46) 107.188,72.46 ; 107.188,72.46 ccw(c108.274,72.46) 107.506,71.692 cw(c108.274,72.46) 107.188,72.46 ; 107.188,76.384 cw(c108.274,76.384) 107.506,77.152 ccw(c108.274,76.384) 107.188,76.384 ; 107.188,76.384 ccw(c106.102,76.384) 106.87,77.152 cw(c106.102,76.384) 107.188,76.384 ; 107.956,70.606 cw(c108.724,71.374) 107.638,71.374 ccw(c108.724,71.374) 107.956,70.606 ; 107.956,70.606 ccw(c107.188,69.838) 107.188,70.924 cw(c107.188,69.838) 107.956,70.606 ; 114.666,43.548 cw(c113.459,43.548) 114.313,42.695 ccw(c113.459,43.548) 114.666,43.548 ; 114.666,43.548 ccw(c115.873,43.548) 115.02,42.695 cw(c115.873,43.548) 114.666,43.548 ; 114.666,47.734 cw(c115.873,47.734) 115.02,48.587 ccw(c115.873,47.734) 114.666,47.734 ; 114.666,47.734 ccw(c113.459,47.734) 114.313,48.587 cw(c113.459,47.734) 114.666,47.734 ; 124.255,43.548 cw(c123.048,43.548) 123.901,42.695 ccw(c123.048,43.548) 124.255,43.548 ; 124.255,43.548 ccw(c125.462,43.548) 124.608,42.695 cw(c125.462,43.548) 124.255,43.548 ; 124.255,47.734 cw(c125.462,47.734) 124.608,48.587 ccw(c125.462,47.734) 124.255,47.734 ; 124.255,47.734 ccw(c123.048,47.734) 123.901,48.587 cw(c123.048,47.734) 124.255,47.734 ; 125.349,111.055 cw(c126.435,111.055) 125.667,111.823 ccw(c126.435,111.055) 125.349,111.055 ; 125.349,111.055 ccw(c124.263,111.055) 125.031,111.823 cw(c124.263,111.055) 125.349,111.055 ; 126.74,101.86 cw(c125.972,101.092) 127.058,101.092 ccw(c125.972,101.092) 126.74,101.86 ; 126.74,101.86 ccw(c127.508,102.628) 127.508,101.542 cw(c127.508,102.628) 126.74,101.86 ; 133.843,43.548 cw(c132.636,43.548) 133.49,42.695 ccw(c132.636,43.548) 133.843,43.548 ; 133.843,43.548 ccw(c135.05,43.548) 134.197,42.695 cw(c135.05,43.548) 133.843,43.548 ; 133.843,47.734 cw(c135.05,47.734) 134.197,48.587 ccw(c135.05,47.734) 133.843,47.734 ; 133.843,47.734 ccw(c132.636,47.734) 133.49,48.587 cw(c132.636,47.734) 133.843,47.734 ; 52.485,55.558 ccw(c50.893,57.15) 53.144,57.15 cw(c50.893,57.15) 52.485,55.558 ; 53.559,51.861 cw(c51.039,49.341) 54.603,49.341 ccw(c51.039,49.341) 53.559,51.861 ; 54.584,50.837 cw(c53.087,49.341) 55.203,49.341 ccw(c53.087,49.341) 54.584,50.837 ; S5.1@114.313,49.695 ccw(c112.197,51.81) 115.189,51.81 cw(c112.197,51.81) S5.1@114.313,49.695 ; S5.1@114.737,49.27 ccw(c113.646,50.362) 115.189,50.362 cw(c113.646,50.362) S5.1@114.737,49.27
  Bottom Layer w0.6: C9.1@51.689,80.645 52.959,79.375 58.547,79.375 C14.2@59.817,80.645 ; RST.1@55.103,49.141 56.619,47.625 65.208,47.625 S0.1@66.724,49.141 ; C1.2@62.916,98.603 65.329,98.603 65.634,98.298 C2.1@68.072,98.298 70.409,98.298 70.79,98.679 C3.2@73.152,98.679 73.914,99.441 ; S0.1@66.724,42.141 68.225,40.64 74.811,40.64 S1.1@76.312,42.141 77.813,40.64 84.4,40.64 S2.1@85.901,42.141 ; S2.1@85.901,49.141 87.409,49.141 88.925,47.625 94.583,47.625 95.489,48.531 S3.1@95.489,49.141 ; S3.1@95.489,42.141 96.99,40.64 103.577,40.64 S4.1@105.078,42.141 106.579,40.64 113.165,40.64 S5.1@114.666,42.141 116.167,40.64 122.754,40.64 S6.1@124.255,42.141 ; P49_64.15@101.092,91.059 P49_64.14@103.632,88.519 ; GND.1@102.616,107.188 101.244,105.816 92.126,105.816 90.449,104.14 90.449,102.387 88.9,100.838 82.296,100.838 C11.2@80.899,99.441 C4.1@78.359,99.441 73.914,99.441 ; GND.3@102.616,112.268 105.105,109.779 122.987,109.779 DownLoad.9@125.349,112.141 ; S6.1@124.255,49.141 125.771,47.625 132.327,47.625 S7.1@133.843,49.141 ; P7.6@127.508,101.092 P7.7@130.048,101.092 ; 52.478,79.856 cw(c53.266,80.645) 52.151,80.645 ccw(c53.266,80.645) 52.478,79.856 ; 52.478,79.856 ccw(c51.689,79.068) 51.689,80.183 cw(c51.689,79.068) 52.478,79.856 ; 59.028,79.856 cw(c59.817,79.068) 59.817,80.183 ccw(c59.817,79.068) 59.028,79.856 ; 59.028,79.856 ccw(c58.24,80.645) 59.355,80.645 cw(c58.24,80.645) 59.028,79.856 ; 64.364,98.603 cw(c64.364,100.051) 63.34,99.027 ccw(c64.364,100.051) 64.364,98.603 ; 64.364,98.603 ccw(c64.364,97.154) 63.34,98.179 cw(c64.364,97.154) 64.364,98.603 ; 66.986,98.298 cw(c66.986,97.212) 67.754,97.98 ccw(c66.986,97.212) 66.986,98.298 ; 66.986,98.298 ccw(c66.986,99.384) 67.754,98.616 cw(c66.986,99.384) 66.986,98.298 ; 69.158,98.298 cw(c69.158,99.384) 68.39,98.616 ccw(c69.158,99.384) 69.158,98.298 ; 69.158,98.298 ccw(c69.158,97.212) 68.39,97.98 cw(c69.158,97.212) 69.158,98.298 ; 72.037,98.679 cw(c72.037,97.564) 72.825,98.352 ccw(c72.037,97.564) 72.037,98.679 ; 72.037,98.679 ccw(c72.037,99.794) 72.825,99.006 cw(c72.037,99.794) 72.037,98.679 ; 73.914,99.441 cw(c73.189,100.166) 73.163,99.141 ccw(c73.189,100.166) 73.914,99.441 ; 73.914,99.441 ccw(c74.639,98.716) 73.614,98.69 cw(c74.639,98.716) 73.914,99.441 ; S1.1@76.312,41.441 cw(c76.312,39.751) 77.507,40.946 ccw(c76.312,39.751) S1.1@76.312,41.441 ; S1.1@76.312,41.441 ccw(c76.312,39.751) 75.117,40.946 cw(c76.312,39.751) S1.1@76.312,41.441 ; 77.273,99.441 cw(c77.273,98.355) 78.041,99.123 ccw(c77.273,98.355) 77.273,99.441 ; 77.273,99.441 ccw(c77.273,100.527) 78.041,99.759 cw(c77.273,100.527) 77.273,99.441 ; 79.445,99.441 cw(c79.445,100.527) 78.677,99.759 ccw(c79.445,100.527) 79.445,99.441 ; 79.445,99.441 ccw(c79.445,98.355) 78.677,99.123 cw(c79.445,98.355) 79.445,99.441 ; 79.813,99.441 cw(c79.813,98.355) 80.581,99.123 ccw(c79.813,98.355) 79.813,99.441 ; 79.813,99.441 ccw(c79.813,100.527) 80.581,99.759 cw(c79.813,100.527) 79.813,99.441 ; 81.667,100.209 cw(c80.899,100.977) 80.899,99.891 ccw(c80.899,100.977) 81.667,100.209 ; 81.667,100.209 ccw(c82.435,99.441) 81.349,99.441 cw(c82.435,99.441) 81.667,100.209 ; 87.108,49.141 cw(c87.108,50.348) 86.254,49.495 ccw(c87.108,50.348) 87.108,49.141 ; 87.108,49.141 ccw(c87.108,47.934) 86.254,48.787 cw(c87.108,47.934) 87.108,49.141 ; 101.848,106.42 cw(c102.616,105.652) 102.616,106.738 ccw(c102.616,105.652) 101.848,106.42 ; 101.848,106.42 ccw(c101.08,107.188) 102.166,107.188 cw(c101.08,107.188) 101.848,106.42 ; 101.86,90.291 cw(c102.628,91.059) 101.542,91.059 ccw(c102.628,91.059) 101.86,90.291 ; 101.86,90.291 ccw(c101.092,89.523) 101.092,90.609 cw(c101.092,89.523) 101.86,90.291 ; 102.864,89.287 cw(c102.096,88.519) 103.182,88.519 ccw(c102.096,88.519) 102.864,89.287 ; 102.864,89.287 ccw(c103.632,90.055) 103.632,88.969 cw(c103.632,90.055) 102.864,89.287 ; 103.384,111.5 cw(c104.152,112.268) 103.066,112.268 ccw(c104.152,112.268) 103.384,111.5 ; 103.384,111.5 ccw(c102.616,110.732) 102.616,111.818 cw(c102.616,110.732) 103.384,111.5 ; S4.1@105.078,41.441 cw(c105.078,39.751) 106.273,40.946 ccw(c105.078,39.751) S4.1@105.078,41.441 ; S4.1@105.078,41.441 ccw(c105.078,39.751) 103.883,40.946 cw(c105.078,39.751) S4.1@105.078,41.441 ; S5.1@114.666,41.441 cw(c114.666,39.751) 115.861,40.946 ccw(c114.666,39.751) S5.1@114.666,41.441 ; S5.1@114.666,41.441 ccw(c114.666,39.751) 113.471,40.946 cw(c114.666,39.751) S5.1@114.666,41.441 ; 124.581,111.373 cw(c125.349,110.605) 125.349,111.691 ccw(c125.349,110.605) 124.581,111.373 ; 124.581,111.373 ccw(c123.813,112.141) 124.899,112.141 cw(c123.813,112.141) 124.581,111.373 ; 128.594,101.092 cw(c128.594,102.178) 127.826,101.41 ccw(c128.594,102.178) 128.594,101.092 ; 128.594,101.092 ccw(c128.594,100.006) 127.826,100.774 cw(c128.594,100.006) 128.594,101.092 ; 128.962,101.092 cw(c128.962,100.006) 129.73,100.774 ccw(c128.962,100.006) 128.962,101.092 ; 128.962,101.092 ccw(c128.962,102.178) 129.73,101.41 cw(c128.962,102.178) 128.962,101.092 ; RST.1@55.103,48.441 cw(c55.103,46.751) 56.298,47.946 ccw(c55.103,46.751) RST.1@55.103,48.441 ; RST.1@55.603,48.941 ccw(c56.327,48.941) 55.815,48.429 cw(c56.327,48.941) RST.1@55.603,48.941 ; 65.529,47.946 cw(c66.724,46.751) 66.724,48.441 ccw(c66.724,46.751) 65.529,47.946 ; 66.012,48.429 ccw(c65.499,48.941) 66.224,48.941 cw(c65.499,48.941) 66.012,48.429 ; S0.1@66.724,41.441 cw(c66.724,39.751) 67.919,40.946 ccw(c66.724,39.751) S0.1@66.724,41.441 ; S0.1@67.224,41.941 ccw(c67.948,41.941) 67.436,41.429 cw(c67.948,41.941) S0.1@67.224,41.941 ; 75.6,41.429 ccw(c75.088,41.941) 75.812,41.941 cw(c75.088,41.941) 75.6,41.429 ; S1.1@76.812,41.941 ccw(c77.536,41.941) 77.024,41.429 cw(c77.536,41.941) S1.1@76.812,41.941 ; 84.706,40.946 cw(c85.901,39.751) 85.901,41.441 ccw(c85.901,39.751) 84.706,40.946 ; 85.189,41.429 ccw(c84.676,41.941) 85.401,41.941 cw(c84.676,41.941) 85.189,41.429 ; 94.788,47.83 ccw(c94.128,48.49) 95.015,48.784 cw(c94.128,48.49) 94.788,47.83 ; S3.1@95.489,41.441 cw(c95.489,39.751) 96.684,40.946 ccw(c95.489,39.751) S3.1@95.489,41.441 ; S3.1@95.989,41.941 ccw(c96.713,41.941) 96.201,41.429 cw(c96.713,41.941) S3.1@95.989,41.941 ; 104.366,41.429 ccw(c103.853,41.941) 104.578,41.941 cw(c103.853,41.941) 104.366,41.429 ; S4.1@105.578,41.941 ccw(c106.302,41.941) 105.79,41.429 cw(c106.302,41.941) S4.1@105.578,41.941 ; 113.954,41.429 ccw(c113.442,41.941) 114.166,41.941 cw(c113.442,41.941) 113.954,41.429 ; S5.1@115.166,41.941 ccw(c115.89,41.941) 115.378,41.429 cw(c115.89,41.941) S5.1@115.166,41.941 ; 123.06,40.946 cw(c124.255,39.751) 124.255,41.441 ccw(c124.255,39.751) 123.06,40.946 ; 123.543,41.429 ccw(c123.03,41.941) 123.755,41.941 cw(c123.03,41.941) 123.543,41.429 ; S6.1@124.255,48.441 cw(c124.255,46.751) 125.45,47.946 ccw(c124.255,46.751) S6.1@124.255,48.441 ; S6.1@124.755,48.941 ccw(c125.479,48.941) 124.967,48.429 cw(c125.479,48.941) S6.1@124.755,48.941 ; 132.648,47.946 cw(c133.843,46.751) 133.843,48.441 ccw(c133.843,46.751) 132.648,47.946 ; 133.131,48.429 ccw(c132.619,48.941) 133.343,48.941 cw(c132.619,48.941) 133.131,48.429
Net1_2: P9.1 RP_8.9 S0.2 | length 63.5
  Top Layer w0.4: S0.2@71.224,42.141 S0.2@71.224,49.141 ; 71.224,43.79 cw(c69.775,43.79) 70.799,42.765 ccw(c69.775,43.79) 71.224,43.79 ; 71.224,43.79 ccw(c72.672,43.79) 71.648,42.765 cw(c72.672,43.79) 71.224,43.79 ; 71.224,47.492 cw(c72.672,47.492) 71.648,48.517 ccw(c72.672,47.492) 71.224,47.492 ; 71.224,47.492 ccw(c69.775,47.492) 70.799,48.517 cw(c69.775,47.492) 71.224,47.492
  Bottom Layer w0.4: RP_8.9@50.8,52.832 68.986,52.832 71.224,50.595 ; P9.1@77.574,53.371 73.327,49.124 71.224,49.124 S0.2@71.224,49.141 71.224,50.595 ; 52.128,52.832 cw(c52.128,54.16) 51.189,53.221 ccw(c52.128,54.16) 52.128,52.832 ; 52.128,52.832 ccw(c52.128,51.504) 51.189,52.443 cw(c52.128,51.504) 52.128,52.832 ; 71.224,50.595 cw(c70.214,50.595) 70.847,49.808 ccw(c70.214,50.595) 71.224,50.595 ; 71.224,50.595 ccw(c72.233,50.595) 71.6,49.808 cw(c72.233,50.595) 71.224,50.595 ; 76.635,52.432 cw(c77.574,51.493) 77.574,52.821 ccw(c77.574,51.493) 76.635,52.432 ; 76.635,52.432 ccw(c75.696,53.371) 77.024,53.371 cw(c75.696,53.371) 76.635,52.432 ; S0.2@71.648,48.717 cw(c72.63,47.735) 72.63,49.124 ccw(c72.63,47.735) S0.2@71.648,48.717 ; S0.2@71.648,49.565 ccw(c72.714,50.632) 72.714,49.124 cw(c72.714,50.632) S0.2@71.648,49.565
Net2_2: P9.2 RP_8.8 S1.2@80.812,42.141 S1.2@80.812,49.141 | length 75.7
  Top Layer w0.4: P9.2@77.574,55.911 78.74,54.745 78.74,53.126 80.812,51.054 S1.2@80.812,49.141 S1.2@80.812,42.141 ; 78.513,54.972 cw(c79.452,55.911) 78.124,55.911 ccw(c79.452,55.911) 78.513,54.972 ; 78.513,54.972 ccw(c77.574,54.033) 77.574,55.361 cw(c77.574,54.033) 78.513,54.972 ; 80.812,43.79 cw(c79.364,43.79) 80.388,42.765 ccw(c79.364,43.79) 80.812,43.79 ; 80.812,43.79 ccw(c82.261,43.79) 81.236,42.765 cw(c82.261,43.79) 80.812,43.79 ; 80.812,47.492 cw(c82.261,47.492) 81.236,48.517 ccw(c82.261,47.492) 80.812,47.492 ; 80.812,47.492 ccw(c79.364,47.492) 80.388,48.517 cw(c79.364,47.492) 80.812,47.492 ; 80.812,50.79 cw(c79.364,50.79) 80.388,49.765 ccw(c79.364,50.79) 80.812,50.79 ; 80.812,50.79 ccw(c82.261,50.79) 81.236,49.765 cw(c82.261,50.79) 80.812,50.79
  Bottom Layer w0.4: RP_8.8@50.8,55.372 51.339,55.911 ; P9.2@77.574,55.911 51.339,55.911 ; 51.339,55.911 cw(c51.16,56.09) 51.046,55.864 ccw(c51.16,56.09) 51.339,55.911 ; 51.339,55.911 ccw(c51.518,55.732) 51.292,55.618 cw(c51.518,55.732) 51.339,55.911 ; 76.246,55.911 cw(c76.246,54.583) 77.185,55.522 ccw(c76.246,54.583) 76.246,55.911 ; 76.246,55.911 ccw(c76.246,57.239) 77.185,56.3 cw(c76.246,57.239) 76.246,55.911 ; RP_8.8@50.623,55.549 cw(c51.498,54.674) 51.498,55.911 ccw(c51.498,54.674) RP_8.8@50.623,55.549 ; RP_8.8@50.906,55.266 cw(c52.463,53.709) 52.463,55.911 ccw(c52.463,53.709) RP_8.8@50.906,55.266 ; RP_8.8@51.189,54.983 cw(c53.429,52.743) 53.429,55.911 ccw(c53.429,52.743) RP_8.8@51.189,54.983